# EAGLE board IO bottom Board (EAGLE 9.6.2)
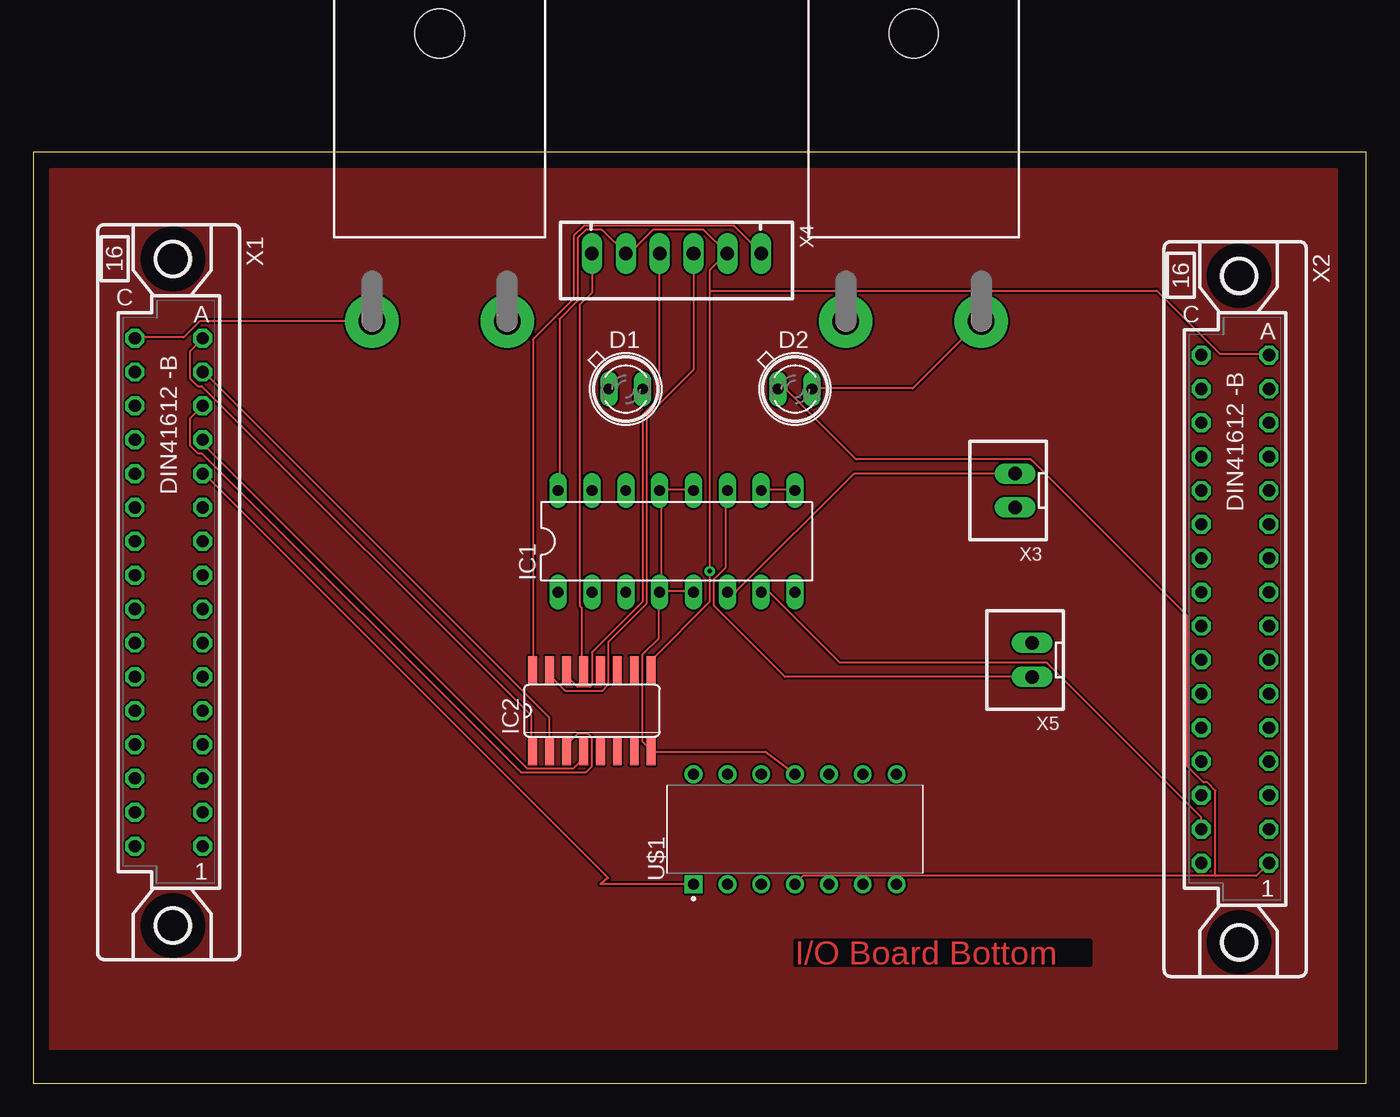
[diagram p0: board, top side]
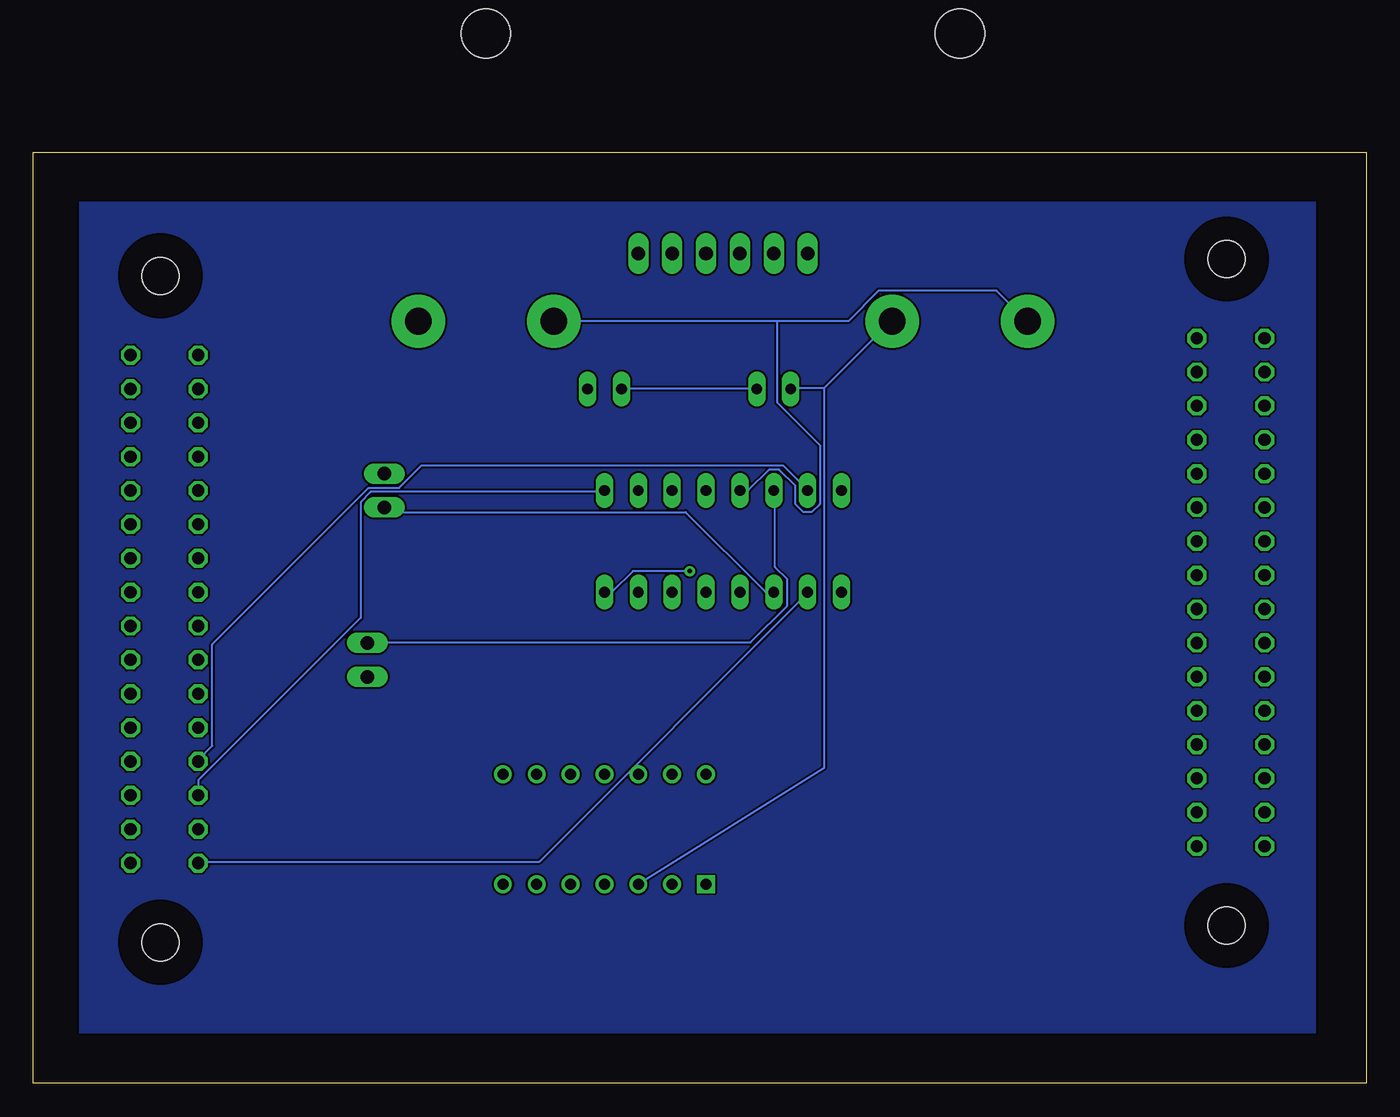
[diagram p1: board, bottom side, seen from below]

Size 100 x 69.84 mm. Coordinates in mm from the lower left corner, seen from the top.
Outline: 0,0 100,0 100,69.84 0,69.84 0,0
Copper layers (1*16): Top 0.035mm / dielectric 1.5mm / Bottom 0.035mm
Design rules "default": minimum track width 6mil, minimum drill 0.35mm, track to track 6mil, track to pad 6mil, pad to pad 6mil, via to via 6mil, smd to smd 6mil, copper to edge 40mil, drill to drill 6mil, minimum pad ring 10mil, minimum via ring 8mil, stop-mask expansion 4mil, vias tented up to drill 0mil, thermal gap 10mil

## Footprints (pad centres in the part's own frame; a part is rotated, then mirrored left to right if it is on the bottom)
SFH482 = drill 0.813 long: A -1.27,0; K 1.27,0
DIL16 = drill 0.813 long: 1 -8.89,-3.81; 2 -6.35,-3.81; 3 -3.81,-3.81; 4 -1.27,-3.81; 5 1.27,-3.81; 6 3.81,-3.81; 7 6.35,-3.81; 8 8.89,-3.81; 9 8.89,3.81; 10 6.35,3.81; 11 3.81,3.81; 12 1.27,3.81; 13 -1.27,3.81; 14 -3.81,3.81; 15 -6.35,3.81; 16 -8.89,3.81
SO16 = smd 0.66 x 2.032: 1 -4.445,-3.073; 2 -3.175,-3.073; 3 -1.905,-3.073; 4 -0.635,-3.073; 5 0.635,-3.073; 6 1.905,-3.073; 7 3.175,-3.073; 8 4.445,-3.073; 9 4.445,3.073; 10 3.175,3.073; 11 1.905,3.073; 12 0.635,3.073; 13 -0.635,3.073; 14 -1.905,3.073; 15 -3.175,3.073; 16 -4.445,3.073
TO-247-2H = drill 2 pad 4: 1 -5.08,-21.59; 2 5.08,-21.59 | hole 3.7: 0,0
DIP825W47P254L1917H533Q14 = drill 0.83 pad 1.18 square: 1 -4.128,7.62 | drill 0.83 pad 1.18: 2 -4.128,5.08; 3 -4.128,2.54; 4 -4.128,0; 5 -4.128,-2.54; 6 -4.128,-5.08; 7 -4.128,-7.62; 8 4.128,-7.62; 9 4.128,-5.08; 10 4.128,-2.54; 11 4.128,0; 12 4.128,2.54; 13 4.128,5.08; 14 4.128,7.62
FAC32SH = drill 0.914 octagon: A1 -2.54,19.05; A2 -2.54,16.51; A3 -2.54,13.97; A4 -2.54,11.43; A5 -2.54,8.89; A6 -2.54,6.35; A7 -2.54,3.81; A8 -2.54,1.27; A9 -2.54,-1.27; A10 -2.54,-3.81; A11 -2.54,-6.35; A12 -2.54,-8.89; A13 -2.54,-11.43; A14 -2.54,-13.97; A15 -2.54,-16.51; A16 -2.54,-19.05; C1 2.54,19.05; C2 2.54,16.51; C3 2.54,13.97; C4 2.54,11.43; C5 2.54,8.89; C6 2.54,6.35; C7 2.54,3.81; C8 2.54,1.27; C9 2.54,-1.27; C10 2.54,-3.81; C11 2.54,-6.35; C12 2.54,-8.89; C13 2.54,-11.43; C14 2.54,-13.97; C15 2.54,-16.51; C16 2.54,-19.05 | hole 2.794: -0.305,24.994; -0.305,-24.994
JST-XH-02-PACKAGE-LONG-PAD = drill 1.016 long: 1 -1.27,0; 2 1.27,0
JST-XH-06-PACKAGE-LONG-PAD = drill 1.016 long: 1 -6.35,0; 2 -3.81,0; 3 -1.27,0; 4 1.27,0; 5 3.81,0; 6 6.35,0

## Placement (x,y rotation side)
D1  SFH482  [SFH482]  44.45,52.07 0 top
D2  SFH482  [SFH482]  57.15,52.07 0 top
IC1  L293D  [DIL16]  48.26,40.64 0 top
IC2  ULN2003AD  [SO16]  41.91,27.94 0 top
R1  [TO-247-2H]  30.48,78.74 0 top
R2  [TO-247-2H]  66.04,78.74 0 top
U$1  LM324N/NOPB  [DIP825W47P254L1917H533Q14]  57.15,19.05 90 top
X1  FAC32SH  [FAC32SH]  10.16,36.83 180 top
X2  FAC32SH  [FAC32SH]  90.17,35.56 180 top
X3  JST-XH-02-PIN-LONG-PAD  [JST-XH-02-PACKAGE-LONG-PAD]  73.66,44.45 90 top
X4  JST-XH-06-PIN-LONG-PAD  [JST-XH-06-PACKAGE-LONG-PAD]  48.26,62.23 180 top
X5  JST-XH-02-PIN-LONG-PAD  [JST-XH-02-PACKAGE-LONG-PAD]  74.93,31.75 90 top

## Library data of the parts
D1 D2 = led
IC1 = st-microelectronics; MPN: L293D; OC_FARNELL: 9589619; OC_NEWARK: 56P8249
IC2 = uln-udn
R1 R2 = resistor-power; OC_FARNELL: unknown; OC_NEWARK: unknown
U$1 = LM324N; AVAILABILITY: Good; DESCRIPTION: 4-Channel industry standard operational amplifier 14-PDIP 0 to 70; MF: Texas Instruments; MP: LM324N; PACKAGE: PDIP-14 Texas Instruments; PRICE: None; PURCHASE-URL: https://pricing.snapeda.com/search/part/LM324N/?ref=eda
X1 X2 = con-vg
X3-X5 = Rembrandt Electronics - JST XH Connectors v1-0

## Nets
N$1: IC1.3 X3.1
N$2: IC1.6 X3.2
N$3: IC1.14 X5.2
N$4: IC1.11 X5.1
N$5: IC1.2 X2.C1
N$6: U$1.2
N$7: D2.K R2.2
N$8: IC1.7 X2.C2
N$9: D1.A R1.2 U$1.3
N$10: IC2.16 X4.1
N$11: IC2.15 X4.3
N$12: IC2.14 X4.4
N$13: IC2.13 X4.6
N$14: U$1.1 X1.A12
N$15: IC1.1
N$16: IC1.4 IC1.5 IC1.12 IC1.13 IC2.8 R1.1 R2.1 U$1.11 X1.C16
N$17: IC2.1 X1.A16
N$18: IC2.2 X1.A15
N$19: IC2.3 X1.A14
N$20: IC2.4 X1.A13
N$21: IC1.9 IC1.10 X2.C3
N$22: IC1.15 X2.C4
N$25: IC1.8 IC1.16 IC2.9 X2.A16 X4.2 X4.5
N$26: D1.K D2.A U$1.4 X2.A1

## Tracks (layer width: path | path; a pad name or v marks a point on that pad's centre or on a via)
GND
  pour Bottom: 3.81,66.04 96.52,66.04 96.52,3.81 3.81,3.81
  pour Top: 1.27,68.58 97.79,68.58 97.79,2.54 1.27,2.54
N$1
  Bottom 0.152: X3.1 73.3,42.82 51.05,42.82 45.11,36.88 44.5,36.88 IC1.3
N$2
  Top 0.152: X3.2 61.57,45.72 52.73,36.88 52.12,36.88 IC1.6
N$3
  Bottom 0.152: IC1.14 44.35,44.35 44.35,38.71 43.43,37.8 43.43,35.81 46.18,33.07 74.83,33.07 X5.2
N$4
  Top 0.152: X5.1 56.39,30.48 51.05,35.81 51.05,37.8 51.97,38.71 51.97,44.35 IC1.11
N$5
  Bottom 0.152: IC1.2 41.91,36.73 62.03,16.61 87.63,16.61 X2.C1
N$7
  Top 0.152: D2.K 58.52,52.12 65.99,52.12 71.02,57.15 R2.2
N$8
  Top 0.152: X2.C2 87.63,19.96 76.05,31.55 60.5,31.55 55.32,36.73 54.71,36.73 IC1.7
N$9
  Bottom 0.152: 40.69,52.12 43.13,52.12 D1.A | 40.69,52.12 35.66,57.15 R1.2 | 40.69,52.12 40.69,23.62 U$1.3
N$10
  Top 0.152: IC2.16 37.49,31.09 37.49,55.78 40.54,58.83 40.54,63.55 41.3,64.31 52.58,64.31 54.56,62.33 X4.1
N$11
  Top 0.152: X4.3 49.53,53.49 46.02,49.99 46.02,35.97 43.13,33.07 43.13,29.87 42.67,29.41 39.93,29.41 38.86,30.48 38.86,30.94 IC2.15
N$12
  Top 0.152: IC2.14 40.08,30.94 40.08,30.48 40.84,29.72 41.76,29.72 41.91,29.87 41.91,32.31 45.72,36.12 45.72,50.14 46.94,51.36 46.94,62.18 X4.4
N$13
  Top 0.152: X4.6 41.91,59.28 41,58.37 41,35.81 41.15,35.66 41.15,31.09 IC2.13
N$14
  Top 0.152: U$1.1 42.54,14.92 43.13,15.39 12.8,45.72 X1.A12
N$16
  Top 0.152: 47.09,36.88 49.53,36.88 IC1.5 | IC1.12 49.53,44.5 47.09,44.5 IC1.13 47.09,44.35 47.09,36.88 | 47.09,36.88 IC1.4 46.94,36.73 46.94,33.38 45.72,32.16 45.72,25.6 46.33,24.99 IC2.8 54.9,24.87 U$1.11 | R1.1 12.5,57.15 11.28,55.93 7.62,55.93 X1.C16
  Bottom 0.152: 44.2,57.15 38.86,57.15 36.58,59.44 27.74,59.44 25.45,57.15 R1.1 | 44.2,57.15 R2.1 | 44.2,57.15 44.2,51.05 41,47.85 41,43.43 41.6,42.82 42.22,42.82 42.82,43.43 42.82,44.81 44.04,46.03 44.81,46.03 46.33,44.5 46.94,44.5 IC1.13
N$17
  Top 0.152: IC2.1 37.34,24.99 37.34,27.58 12.65,52.27 12.34,52.27 11.73,52.88 11.73,54.86 12.65,55.78 X1.A16
N$18
  Top 0.152: IC2.2 38.71,24.99 38.71,27.43 12.8,53.34 X1.A15
N$19
  Top 0.152: X1.A14 11.73,49.84 11.73,47.85 12.34,47.24 12.65,47.24 36.58,23.32 41.45,23.32 41.91,23.77 41.91,25.91 41.6,26.21 40.84,26.21 40.08,25.45 40.08,24.99 IC2.3
N$20
  Top 0.152: IC2.4 41.15,24.84 41.15,24.23 40.54,23.62 37.03,23.62 12.8,47.85 12.8,48.16 X1.A13
N$21
  Top 0.152: IC1.10 54.71,44.5 57.15,44.5 IC1.9
  Bottom 0.152: X2.C3 87.63,22.71 75.44,34.9 75.44,43.59 74.68,44.35 57.15,44.35 IC1.9
N$22
  Bottom 0.152: IC1.15 41.91,44.5 43.74,46.33 70.87,46.33 72.54,44.65 74.83,44.65 86.56,32.92 86.56,25.3 87.63,24.23 X2.C4
N$25  (via drill 0.35)
  Top 0.152: IC1.16 39.47,44.5 39.47,57.3 40.84,58.67 40.84,63.4 41.45,64.01 42.67,64.01 X4.5 44.5,62.33 44.81,62.33 46.48,64.01 50.29,64.01 X4.2 51.97,62.18 50.75,60.96 50.75,59.44 | 50.75,59.44 v50.75,38.41 50.75,36.12 46.48,31.85 46.48,31.09 IC2.9 | 50.75,59.44 84.28,59.44 89,54.71 92.66,54.71 X2.A16
  Bottom 0.152: v50.75,38.41 55.02,38.41 56.54,36.88 57.15,36.88 IC1.8
N$26
  Top 0.152: 88.7,15.54 91.75,15.54 X2.A1 | 88.7,15.54 57.76,15.54 U$1.4 | 88.7,15.54 88.7,21.95 88.09,22.55 87.78,22.55 86.56,23.77 86.56,35.05 74.83,46.79 61.72,46.79 56.54,51.97 55.93,51.97 D2.A
  Bottom 0.152: D1.K 45.72,52.12 55.78,52.12 D2.A

## Text on the board
Top: I/O Board Bottom